# Allegro board PP001751.01.brd
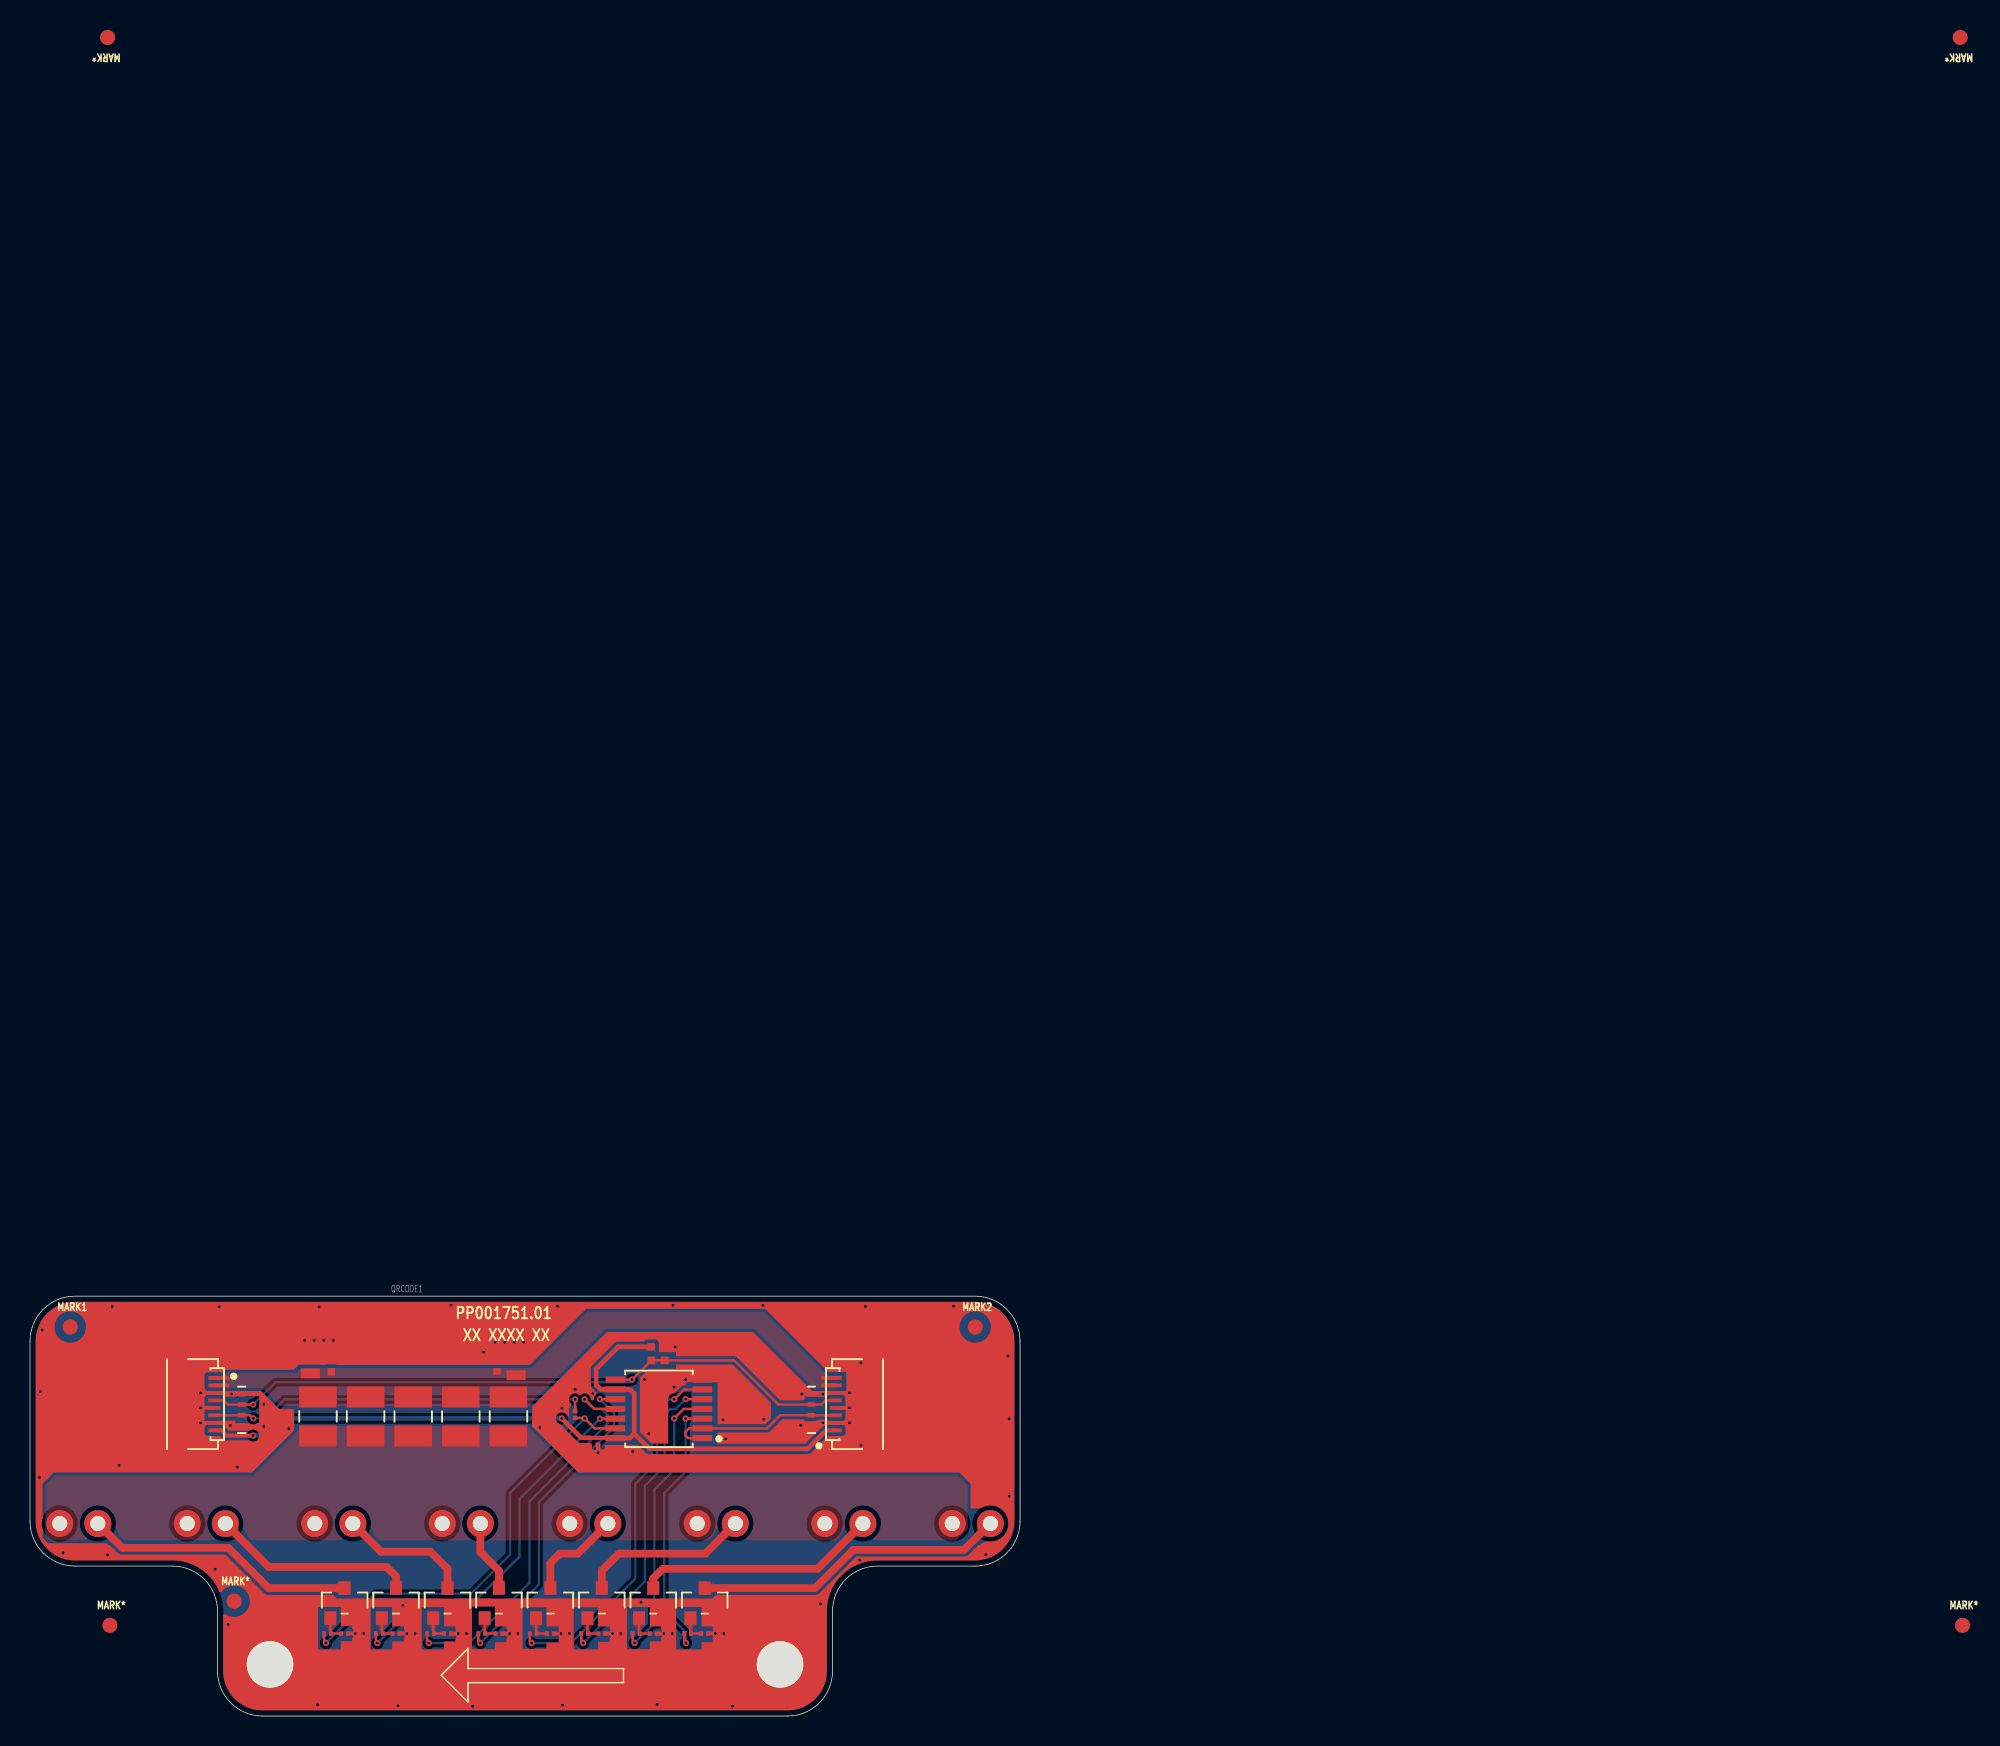
[diagram p0: board, top side]
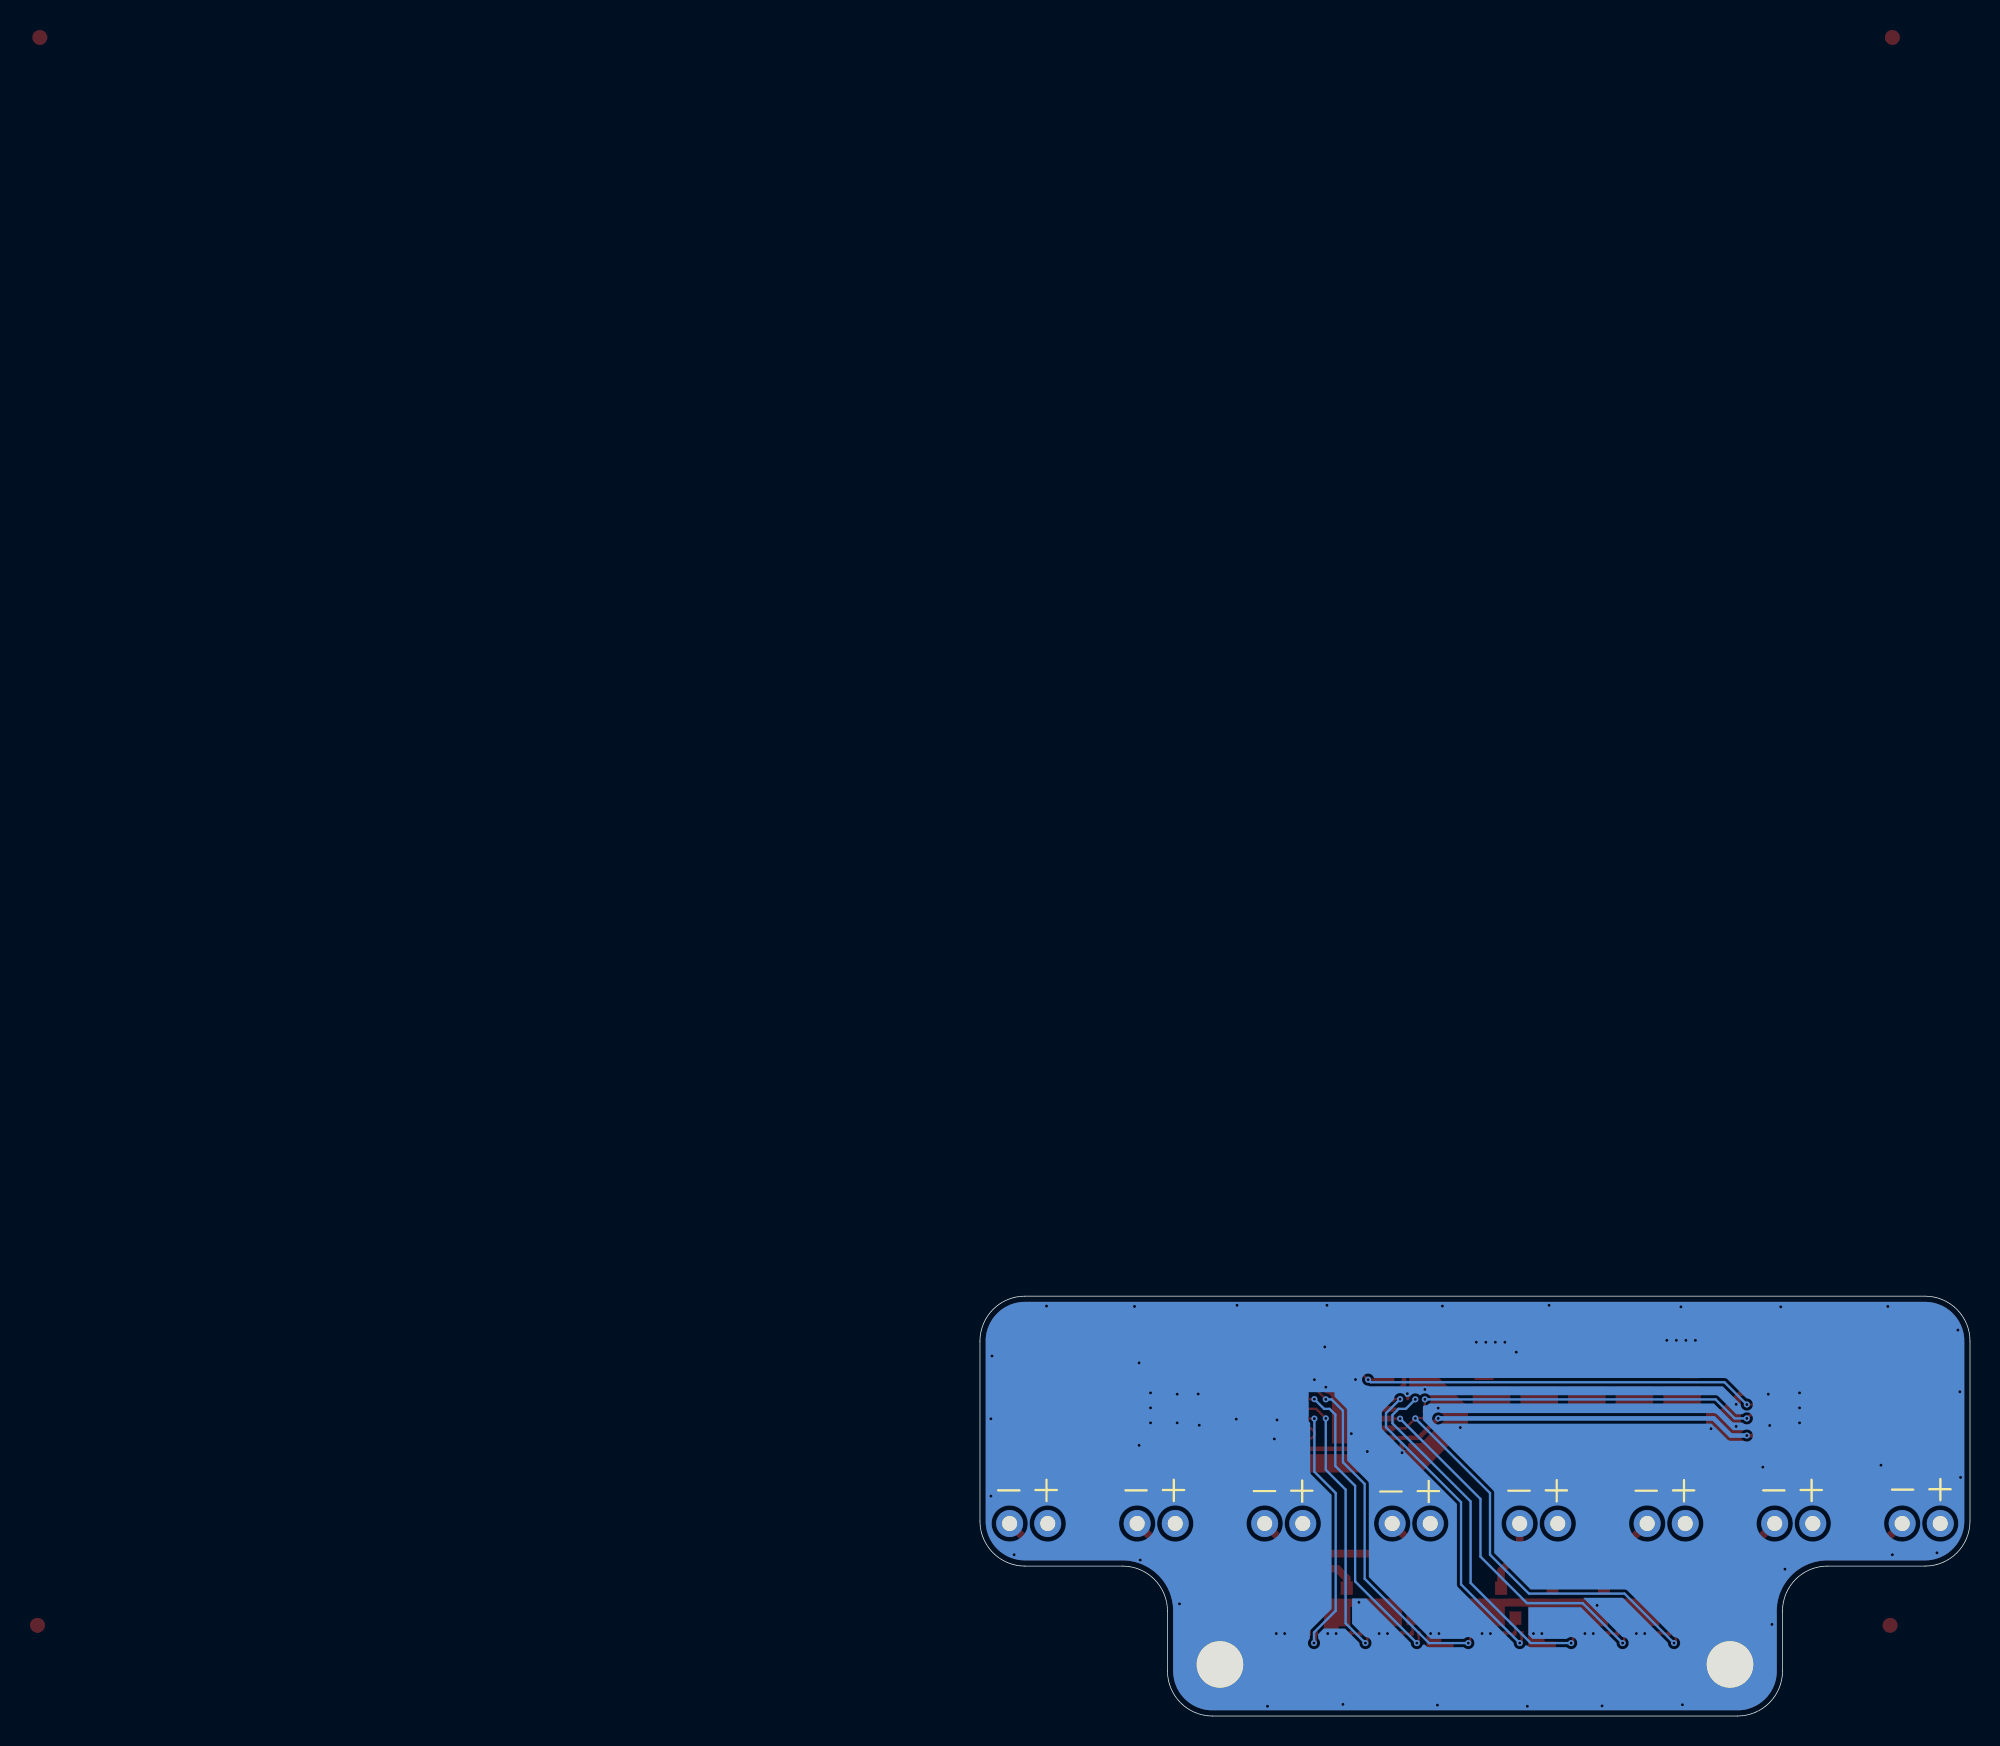
[diagram p1: board, bottom side, seen from below]

Outline 66 x 28 mm; copper layers: TOP, BOTTOM. Coordinates in mm from the lower left corner of the outline.
Outline path: 0,25 0,13 arc(0.88,10.88) 3,10 9.5,10 arc(11.62,9.12) 12.5,7 12.5,3 arc(13.38,0.88) 15.5,0 50.5,0 arc(52.62,0.88) 53.5,3 53.5,7 arc(54.38,9.12) 56.5,10 63,10 arc(65.12,10.88) 66,13 66,25 arc(65.12,27.13) 63,28 3,28 arc(0.88,27.13) 0,25

## Design rules (mm)
constraint set DEFAULT: min track width 0.152
net group PWR: nets GND VCC_3V3

## Placement (name value [footprint] x y rotation side)
C1  100.0nF  [C0201_A]  37.86 18.33 270 top
C2  10.0uF  [C0805_D]  18.69 23.53 90 top
C3  10.0uF  [C0805_D]  32.4 23.41 90 top
C4  1.0uF  [C0402_B]  31.13 23.36 90 top
C5  100nF  [C0402]  20.08 23.41 90 top
D1  SFH4550E9610_NC  [D_5P9X5P5-9]  62.75 12.84 0 bottom
D2  SFH4550E9610_NC  [D_5P9X5P5-9]  54.25 12.84 0 bottom
D3  SFH4550E9610_NC  [D_5P9X5P5-9]  45.75 12.84 0 bottom
D4  SFH4550E9610_NC  [D_5P9X5P5-9]  37.25 12.84 0 bottom
D5  SFH4550E9610_NC  [D_5P9X5P5-9]  28.75 12.84 0 bottom
D6  SFH4550E9610_NC  [D_5P9X5P5-9]  20.25 12.84 0 bottom
D7  SFH4550E9610_NC  [D_5P9X5P5-9]  11.75 12.84 0 bottom
D8  SFH4550E9610_NC  [D_5P9X5P5-9]  3.25 12.84 0 bottom
D9  PESD5V0F1BL  [SOD882_2-0P65-1P02X0P62-0P5]  52.09 21.12 90 top
D13  PESD5V0F1BL  [SOD882_2-0P65-1P02X0P62-0P5]  52.09 19.72 270 top
D14  PESD5V0F1BL  [SOD882_2-0P65-1P02X0P62-0P5]  14.12 19.72 270 top
D15  PESD5V0F1BL  [SOD882_2-0P65-1P02X0P62-0P5]  14.12 21.12 90 top
HOLE1  Hole  [HOLE_PC5P5DC3P1]  16 3.44 0 top
HOLE2  Hole  [HOLE_PC5P5DC3P1]  50 3.44 0 top
J1  OK-F501-08325  [OK-F501_8-0P5-6X3P8-1P85]  55.17 20.8 90 top
J2  OK-F501-08325  [OK-F501_8-0P5-6X3P8-1P85]  10.83 20.8 270 top
MARK1  T POINT R  [MARK_C1]  2.69 25.95 0 top
MARK2  T POINT R  [MARK_C1]  63.01 25.95 0 top
MARK*  -  [unnamed]  13.61 7.66 0 top
MARK*#2  -  [unnamed]  5.33 6.05 0 top
MARK*#3  -  [unnamed]  128.83 6.05 0 top
MARK*#4  -  [unnamed]  128.67 111.96 180 top
MARK*#5  -  [unnamed]  5.17 111.96 180 top
NOREF  -  [#2]  108.85 0 90 top
NOREF#2  -  [#2]  0 114.54 0 top
Q1  MMSS8050-H  [SOT-23_3-1P9-3P04X1P4-1P22]  44.98 7.53 0 top
Q2  MMSS8050-H  [SOT-23_3-1P9-3P04X1P4-1P22]  41.55 7.53 0 top
Q3  MMSS8050-H  [SOT-23_3-1P9-3P04X1P4-1P22]  38.12 7.53 0 top
Q4  MMSS8050-H  [SOT-23_3-1P9-3P04X1P4-1P22]  34.69 7.53 0 top
Q5  MMSS8050-H  [SOT-23_3-1P9-3P04X1P4-1P22]  31.26 7.53 0 top
Q6  MMSS8050-H  [SOT-23_3-1P9-3P04X1P4-1P22]  27.83 7.53 0 top
Q7  MMSS8050-H  [SOT-23_3-1P9-3P04X1P4-1P22]  24.4 7.53 0 top
Q8  MMSS8050-H  [SOT-23_3-1P9-3P04X1P4-1P22]  20.97 7.53 0 top
QRCODE1  T POINT R  [QRCODE_3P5X3P5]  25.29 25.44 0 top
R1  100.0R_NC  [R0402]  41.42 24.17 90 top
R2  100.0R_NC  [R0402]  42.31 24.17 270 top
R3  1.0KR  [R0201]  36.34 20.1 90 top
R4  82.0R  [R1210]  22.37 19.98 90 top
R5  82.0R  [R1210]  25.55 19.98 90 top
R6  82.0R  [R1210]  28.72 19.98 90 top
R7  82.0R  [R1210]  19.2 19.98 90 top
R8  82.0R_NC  [R1210]  31.9 19.98 90 top
R9  510.0R  [R0201]  43.83 5.5 180 top
R10  510.0R  [R0201]  40.4 5.5 180 top
R11  510.0R  [R0201]  36.98 5.5 180 top
R12  510.0R  [R0201]  33.55 5.5 180 top
R13  510.0R  [R0201]  30.12 5.5 180 top
R14  510.0R  [R0201]  26.69 5.5 180 top
R15  510.0R  [R0201]  23.28 5.5 180 top
R16  510.0R  [R0201]  19.83 5.5 180 top
R17  10.0KR  [R0201]  44.98 5.5 180 top
R18  10.0KR  [R0201]  41.55 5.5 180 top
R19  10.0KR  [R0201]  38.12 5.5 180 top
R20  10.0KR  [R0201]  34.69 5.5 180 top
R21  10.0KR  [R0201]  31.26 5.5 180 top
R22  10.0KR  [R0201]  27.83 5.5 180 top
R23  10.0KR  [R0201]  24.4 5.5 180 top
R24  10.0KR  [R0201]  20.97 5.5 180 top
U1  74HC164PW  [SOP_14-0P65-5P1X4P5-1P2]  41.93 20.49 90 top

## Library data of the parts
C1 = C
C2-C5 = CAP NP
D1-D8 = LED
D9 D13-D15 = PESD5V0F1BL
HOLE1 HOLE2 = Hole
J1 J2 = 1X8-CON-2
MARK1 MARK2 QRCODE1 = T POINT R
Q1-Q8 = NPN-1
R1-R3 R9-R24 = R
R4-R8 = RES
U1 = 74HC164PW

## Footprints (pads in the part's own frame, mm; a bottom-side part is the same pattern mirrored in y, then rotated)
C0201_A
  rect 0.254x0.305 smd: 1(-0.229,0) 2(0.229,0)
C0402
  rect 0.5x0.5 smd: 1(-0.45,0) 2(0.45,0)
C0402_B
  rect 0.432x0.508 smd: 1(-0.369,0) 2(0.369,0)
C0805_D
  rect 0.66x1.27 smd: 1(-0.673,0) 2(0.673,0)
D_5P9X5P5-9
  round 1.8 hole 1: A(-1.27,0) C(1.27,0)
HOLE_PC5P5DC3P1
  round 5.5 hole 3.1: 1(0,0)
MARK_C1
  round 1 smd: 1(0,0)
OK-F501_8-0P5-6X3P8-1P85
  rect 0.25x0.8 smd: 1(-1.75,1.45) 2(-1.25,1.45) 3(-0.75,1.45) 4(-0.25,1.45) 5(0.25,1.45) 6(0.75,1.45) 7(1.25,1.45) 8(1.75,1.45)
  rect 0.4x0.8 smd: 9(-2.75,-1.05) 10(2.75,-1.05)
QRCODE_3P5X3P5
  round 0.076 smd: 1(0,0)
R0201
  rect 0.254x0.305 smd: 1(-0.229,0) 2(0.229,0)
R0402
  rect 0.5x0.5 smd: 1(-0.45,0) 2(0.45,0)
R1210
  rect 1.4x2.5 smd: 1(-1.3,0) 2(1.3,0)
SOD882_2-0P65-1P02X0P62-0P5
  rect 0.3x0.5 smd: A(-0.345,0) C(0.345,0)
SOP_14-0P65-5P1X4P5-1P2
  rect 0.4x1.3 smd: 1(-1.95,-2.9) 2(-1.3,-2.9) 3(-0.65,-2.9) 4(0,-2.9) 5(0.65,-2.9) 6(1.3,-2.9) 7(1.95,-2.9) 8(1.95,2.9) 9(1.3,2.9) 10(0.65,2.9) 11(0,2.9) 12(-0.65,2.9) 13(-1.3,2.9) 14(-1.95,2.9)
SOT-23_3-1P9-3P04X1P4-1P22
  rect 0.8x0.9 smd: 1(-0.95,-1) 2(0.95,-1) 3(0,1)
unnamed
  round 1 smd: 1(0,0)

## Nets
GND: C1.2 C2.2 C3.2 C4.2 C5.2 D9.C D13.C D14.C D15.C HOLE1.1 HOLE2.1 J1.2 J1.4 J1.6 J1.9 J1.10 J2.3 J2.5 J2.7 J2.9 J2.10 Q1.2(EMITTER) Q2.2(EMITTER) Q3.2(EMITTER) Q4.2(EMITTER) Q5.2(EMITTER) Q6.2(EMITTER) Q7.2(EMITTER) Q8.2(EMITTER) QRCODE1.1(TP) R2.1 R17.1 R18.1 R19.1 R20.1 R21.1 R22.1 R23.1 R24.1 U1.7
VCC_3V3: C1.1 J1.1 J2.8 R1.2 U1.9 U1.14(VCC)
VCC_5V: C2.1 C3.1 C4.1 C5.1 J1.7 J1.8 J2.1 J2.2 R4.2 R5.2 R6.2 R7.2 R8.2
TX_CLK: D9.A D15.A J1.5 J2.4 R1.1 R2.2 U1.8
TX_DATA: D13.A J1.3 U1.1 U1.2
TX_NEXT: D14.A J2.6 R3.2
TX_Q0: R9.2 U1.3
TX_Q1: R10.2 U1.4
TX_Q2: R11.2 U1.5
TX_Q3: R12.2 U1.6
TX_Q4: R13.2 U1.10
TX_Q5: R14.2 U1.11
TX_Q6: R15.2 U1.12
TX_Q7: R3.1 R16.2 U1.13
N16762361: Q1.1 R9.1 R17.2
N16763130: Q2.1 R10.1 R18.2
N16763354: Q3.1 R11.1 R19.2
N16763582: Q4.1 R12.1 R20.2
N16763816: Q5.1 R13.1 R21.2
N16764058: Q6.1 R14.1 R22.2
N16764304: Q7.1 R15.1 R23.2
N16764556: Q8.1 R16.1 R24.2
N16764715: D1.A D2.A D3.A D4.A D5.A D6.A D7.A D8.A R4.1 R5.1 R6.1 R7.1 R8.1
N16764844: D8.C(CATHODE) Q8.3
N16766443: D1.C(CATHODE) Q1.3
N16766455: D2.C(CATHODE) Q2.3
N16766459: D3.C(CATHODE) Q3.3
N16766463: D4.C(CATHODE) Q4.3
N16766467: D5.C(CATHODE) Q5.3
N16766482: D6.C(CATHODE) Q6.3
N16766486: D7.C(CATHODE) Q7.3

Pads without a net: MARK1 1; MARK2 1; MARK* 1; MARK*#2 1; MARK*#3 1; MARK*#4 1; MARK*#5 1

## Via types
v1: diameter 0.406, hole 0.203, TOP to BOTTOM, 110 vias

## Routing (per net, layer and track width the routed paths; a pad name or vN(x,y) marks a point on that pad's centre or on a via; arc(x,y) is an arc through that point)
GND: length 29.8
  TOP w0.254: v1(11.36,19.55) J2.7 13.18,19.55 v1(13.35,19.38) D14.C ; D15.C v1(13.44,21.47) 13.26,21.47 13.17,21.55 J2.3 v1(11.36,21.55) ; v1(52.85,21.47) 52.94,21.55 J1.6 v1(54.63,21.55) ; R20.1 v1(35.4,5.5) ; R24.1 v1(21.68,5.5) ; R19.1 v1(38.83,5.5) ; R23.1 v1(25.11,5.5) ; J1.4 v1(54.63,20.55) ; J2.5 v1(11.36,20.55) ; R17.1 v1(45.69,5.5) ; v1(52.85,19.55) J1.2 v1(54.63,19.55) ; R21.1 v1(31.97,5.5) ; R22.1 v1(28.54,5.5) ; R18.1 v1(42.26,5.5)
  TOP w0.305: U1.7 v1(43.71,22.44) ; D9.C v1(52.85,21.47) ; Q5.2 32.53,6.21 v1(32.53,5.5) ; v1(42.82,5.5) 42.82,6.21 Q2.2 ; v1(22.24,5.5) 22.24,6.21 Q8.2 ; Q4.2 35.96,6.21 v1(35.96,5.5) ; Q3.2 39.39,6.21 v1(39.39,5.5) ; v1(25.67,5.5) 25.67,6.21 Q7.2 ; Q1.2 46.25,6.21 v1(46.25,5.5) ; v1(52.85,19.55) 52.67,19.38 D13.C ; C1.2 v1(37.86,17.56) ; J1.9 v1(55.39,18.05) ; v1(29.1,5.5) 29.1,6.21 Q6.2 ; J1.10 v1(55.39,23.55) ; R2.1 v1(43.01,24.62)
  vias: v1(0.63,15.91) v1(0.68,21.63) v1(0.81,25.74) v1(2.2,10.88) v1(5.17,10.76) v1(5.48,27.32) v1(5.94,16.73) v1(12.34,9.79) v1(12.62,27.29) v1(13.2,6.11) v1(13.81,16.6) v1(15.59,20.79) v1(15.59,19.32) v1(17.27,19.17) v1(18.31,25.06) v1(18.94,25.06) v1(19.17,0.75) v1(19.27,27.29) v1(19.58,25.06) v1(20.21,25.06) v1(24.53,0.67) v1(24.86,7.38) v1(28.06,27.39) v1(29.51,0.65) v1(30.24,24.27) v1(31.01,24.93) v1(31.64,24.93) v1(32.28,24.93) v1(32.91,24.93) v1(33.98,19.24) v1(35.17,27.34) v1(35.45,20.54) v1(35.5,0.72) v1(36.34,21.78) v1(37.51,21.5) v1(40.18,17.64) v1(40.73,7.58) v1(40.96,22.44) v1(41.24,18.83) v1(41.8,0.78) v1(42.87,27.39) v1(42.94,21.93) v1(46.2,19.75) v1(46.37,18.48) v1(46.83,0.65) v1(48.86,27.39) v1(48.91,19.8) v1(51.38,19.39) v1(51.45,21.48) v1(52.7,7.48) v1(55.31,10.4) v1(55.7,27.32) v1(61.56,27.34) v1(63.72,10.76) v1(65.19,24.02) v1(65.27,19.83) v1(65.27,14.67)
VCC_3V3: length 54.5
  TOP w0.254: 52.89,18.87 53.07,19.05 J1.1 ; J2.8 12.75,19.05 13.1,18.71 v1(14.88,18.71) ; U1.14 39.01,18.56 C1.1 37.36,18.56
  TOP w0.305: 40.28,18.83 41.29,17.82 51.83,17.82 52.89,18.87 ; 40.28,18.83 39.98,18.54 U1.14 ; 40.28,18.83 40.28,21.5 39.99,21.79 U1.9 38.04,21.79 37.74,22.09 37.74,23.15 39.2,24.62 R1.2 ; v1(35.45,19.85) 36.75,18.56 37.36,18.56
  BOTTOM w0.305: v1(35.45,19.85) 17.09,19.85 15.94,18.71 v1(14.88,18.71)
VCC_5V: length 3.5
  TOP w0.254: J1.7 52.85,22.05 ; J2.2 13.18,22.05 ; J2.1 13.18,22.55 ; J1.8 52.85,22.55
TX_CLK: length 45.2
  TOP w0.152: J2.4 12.91,21.05 13.19,20.78 D15.A v1(14.88,20.78) ; J1.5 53.04,21.05 52.76,20.78 D9.A 49.89,20.78 46.95,23.72 R2.2 R1.1 40.14,22.44 v1(40.13,22.44) U1.8
  BOTTOM w0.152: v1(14.88,20.78) 16.37,22.26 39.95,22.26 v1(40.13,22.44)
TX_DATA: length 11.9
  TOP w0.152: J1.3 52.1,20.05 D13.A 50.02,20.07 49.14,19.19 U1.2 43.93,19.19 43.7,18.95 43.7,18.72 43.88,18.54 U1.1
TX_NEXT: length 25.5
  TOP w0.152: v1(14.88,19.85) 14.66,20.07 D14.A 14.1,20.05 J2.6 ; R3.2 v1(36.34,21.12)
  BOTTOM w0.152: v1(36.34,21.12) 16.96,21.12 15.69,19.85 v1(14.88,19.85)
TX_Q0: length 18
  TOP w0.152: R9.2 43.6,4.99 v1(43.73,4.86) ; U1.3 v1(43.71,19.84)
  BOTTOM w0.152: v1(43.73,4.86) 43.73,5.58 42.28,7.02 42.28,14.87 43.71,16.3 v1(43.71,19.84)
TX_Q1: length 18.9
  TOP w0.152: v1(40.3,4.86) 40.18,4.99 R10.2 ; U1.4 43.58,20.49 v1(42.94,19.85)
  BOTTOM w0.152: v1(42.94,19.85) 42.94,16.42 41.62,15.1 41.62,6.19 v1(40.3,4.86)
TX_Q2: length 21.1
  TOP w0.152: R11.2 36.75,4.99 v1(36.87,4.86) ; U1.5 v1(43.71,21.14)
  BOTTOM w0.152: v1(43.71,21.14) 43.06,20.49 42.69,20.49 42.31,20.1 42.31,16.68 40.99,15.36 40.99,8.98 v1(36.87,4.86)
TX_Q3: length 24.8
  TOP w0.152: R12.2 33.32,4.99 v1(33.44,4.86) ; v1(42.94,21.12) 43.61,21.79 U1.6
  BOTTOM w0.152: v1(33.44,4.86) 36.06,4.86 40.35,9.16 40.35,15.48 41.8,16.93 41.8,20.36 42.56,21.12 v1(42.94,21.12)
TX_Q4: length 22.1
  TOP w0.152: R13.2 29.89,4.99 v1(30.02,4.86) ; U1.10 v1(37.99,21.14)
  BOTTOM w0.152: v1(37.99,21.14) 38.93,20.2 38.93,19.27 33.93,14.26 33.93,8.78 v1(30.02,4.86)
TX_Q5: length 26.7
  TOP w0.152: R14.2 26.46,4.99 v1(26.59,4.86) ; U1.11 37.61,20.49 v1(36.98,21.12)
  BOTTOM w0.152: v1(36.98,21.12) 37.61,20.49 38.09,20.49 38.5,20.08 38.5,19.52 33.29,14.31 33.29,8.88 29.28,4.86 v1(26.59,4.86)
TX_Q6: length 25
  TOP w0.152: v1(23.16,4.86) 23.06,4.97 R15.2 ; U1.12 v1(37.99,19.84)
  BOTTOM w0.152: v1(23.16,4.86) 25.82,7.53 29.53,7.53 32.63,10.63 32.63,14.48 v1(37.99,19.84)
TX_Q7: length 29.5
  TOP w0.152: v1(19.73,4.86) 19.6,4.99 R16.2 ; U1.13 37.64,19.19 v1(36.98,19.85) 36.95,19.88 R3.1
  BOTTOM w0.152: v1(19.73,4.86) 23.03,8.17 29.41,8.17 32,10.76 32,14.87 v1(36.98,19.85)
N16762361: length 1.7
  TOP w0.152: R17.2 R9.1 44.03,5.54 Q1.1
N16763130: length 1.7
  TOP w0.152: R18.2 R10.1 40.6,5.54 Q2.1
N16763354: length 1.7
  TOP w0.152: Q3.1 37.17,5.54 R11.1 R19.2
N16763582: length 1.7
  TOP w0.152: Q4.1 33.74,5.54 R12.1 R20.2
N16763816: length 1.7
  TOP w0.152: Q5.1 30.31,5.54 R13.1 R21.2
N16764058: length 1.7
  TOP w0.152: R22.2 R14.1 26.88,5.54 Q6.1
N16764304: length 1.7
  TOP w0.152: Q7.1 23.45,5.56 R15.1 R23.2
N16764556: length 1.7
  TOP w0.152: Q8.1 20.02,5.54 R16.1 R24.2
N16764844: length 18.2
  TOP w0.508: Q8.3 15.91,8.53 13.23,11.21 6.15,11.21 D8.C
N16766443: length 20.8
  TOP w0.508: D1.C 62.27,11.09 54.88,11.09 52.33,8.53 Q1.3
N16766455: length 16.1
  TOP w0.508: Q2.3 41.55,9.18 42.18,9.82 52.5,9.82 D2.C
N16766459: length 11.4
  TOP w0.508: Q3.3 38.12,9.69 39.26,10.83 45.01,10.83 D3.C
N16766463: length 6.6
  TOP w0.508: Q4.3 34.69,10.2 35.32,10.83 36.51,10.83 D4.C
N16766467: length 4.8
  TOP w0.508: D5.C 30.02,10.93 31.26,9.69 Q5.3
N16766482: length 8.8
  TOP w0.508: Q6.3 27.83,9.82 26.69,10.96 23.4,10.96 D6.C
N16766486: length 13.6
  TOP w0.508: Q7.3 24.4,9.31 23.77,9.94 15.92,9.94 D7.C

## Copper pours and planes (outline as drawn; the poured copper is in the pictures)
GND on TOP (solid shape): 49.4,20.88 49.4,19.84 49.02,19.47 45.87,19.47 45.84,19.48 45.84,22.26 43.73,22.26 43.73,22.07 43.61,22.07 43.5,22.04 43.41,21.98 42.96,21.53 42.94,21.53 42.65,21.41 42.54,21.12 42.54,21.11 42.54,19.87 42.54,19.84 42.54,18.17 41.44,18.17 40.66,18.96 40.66,22.56 41.25,23.15 43.07,23.15 43.07,23.44 46.83,23.44
GND on TOP (solid shape): 63,27.62 63.07,27.62 63.22,27.61 63.37,27.6 63.51,27.57 63.65,27.54 63.8,27.5 63.93,27.45 64.07,27.4 64.2,27.33 64.33,27.26 64.46,27.18 64.57,27.1 64.69,27.01 64.8,26.91 64.9,26.8 65,26.69 65.09,26.58 65.18,26.46 65.26,26.34 65.33,26.21 65.39,26.07 65.45,25.94 65.5,25.8 65.54,25.66 65.57,25.52 65.59,25.37 65.61,25.22 65.62,25.08 65.62,25 65.62,13 65.62,12.93 65.61,12.78 65.59,12.63 65.57,12.49 65.54,12.35 65.5,12.2 65.45,12.07 65.39,11.93 65.33,11.8 65.26,11.67 65.18,11.54 65.09,11.42 65,11.31 64.9,11.2 64.8,11.1 64.69,11 64.57,10.91 64.46,10.82 64.33,10.74 64.2,10.67 64.07,10.61 63.93,10.55 63.8,10.5 63.65,10.46 63.51,10.43 63.37,10.41 63.22,10.39 63.07,10.38 63,10.38 56.5,10.38 56.42,10.38 56.25,10.37 56.09,10.36 55.92,10.33 55.76,10.3 55.6,10.26 55.44,10.21 55.28,10.16 55.13,10.09 54.98,10.02 54.83,9.94 54.69,9.86 54.55,9.76 54.42,9.67 54.29,9.56 54.17,9.45 54.05,9.33 53.94,9.21 53.83,9.08 53.73,8.95 53.64,8.81 53.56,8.67 53.48,8.52 53.41,8.37 53.34,8.22 53.29,8.06 53.24,7.9 53.2,7.74 53.17,7.58 53.14,7.41 53.13,7.25 53.12,7.08 53.12,7 53.12,3 53.12,2.93 53.11,2.78 53.09,2.63 53.07,2.49 53.04,2.35 53,2.2 52.95,2.07 52.89,1.93 52.83,1.8 52.76,1.67 52.68,1.54 52.59,1.42 52.5,1.31 52.4,1.2 52.3,1.1 52.19,1 52.07,0.91 51.95,0.82 51.83,0.74 51.7,0.67 51.57,0.61 51.43,0.55 51.3,0.5 51.15,0.46 51.01,0.43 50.87,0.41 50.72,0.39 50.57,0.38 50.5,0.38 15.5,0.38 15.43,0.38 15.28,0.39 15.13,0.41 14.99,0.43 14.85,0.46 14.7,0.5 14.57,0.55 14.43,0.61 14.3,0.67 14.17,0.74 14.04,0.82 13.92,0.91 13.81,1 13.7,1.1 13.6,1.2 13.5,1.31 13.41,1.42 13.32,1.54 13.24,1.67 13.17,1.8 13.11,1.93 13.05,2.07 13,2.2 12.96,2.35 12.93,2.49 12.91,2.63 12.89,2.78 12.88,2.93 12.88,3 12.88,4.43 44.77,4.43 44.77,4.92 45.51,4.92 45.51,5.2 45.52,5.22 45.54,5.25 45.55,5.29 45.56,5.33 45.56,5.35 45.56,5.65 45.56,5.67 45.55,5.71 45.54,5.75 45.52,5.78 45.51,5.8 45.51,5.98 44.77,5.98 44.77,7.28 43.07,7.28 43.07,4.43 37.86,4.43 37.86,4.46 41.32,4.46 41.32,4.97 42.08,4.97 42.08,5.2 42.09,5.22 42.11,5.25 42.13,5.29 42.13,5.33 42.13,5.35 42.13,5.65 42.13,5.67 42.13,5.71 42.11,5.75 42.09,5.78 42.08,5.8 42.08,5.98 41.32,5.98 41.32,7.28 39.79,7.28 39.79,4.46 37.86,4.46 37.86,4.94 38.65,4.94 38.65,5.2 38.66,5.22 38.68,5.25 38.7,5.29 38.7,5.33 38.7,5.35 38.7,5.65 38.7,5.67 38.7,5.71 38.68,5.75 38.66,5.78 38.65,5.8 38.65,5.98 37.86,5.98 37.86,7.25 36.24,7.25 36.24,4.43 27.6,4.43 27.6,4.46 31.01,4.46 31.01,4.48 33.3,4.48 33.33,4.48 33.37,4.46 33.42,4.46 33.47,4.46 33.52,4.46 33.56,4.48 33.59,4.48 34.44,4.48 34.44,4.89 35.25,4.89 35.25,5.24 35.26,5.27 35.27,5.32 35.27,5.35 35.27,5.65 35.27,5.68 35.26,5.73 35.25,5.76 35.25,5.98 34.44,5.98 34.44,7.25 32.84,7.25 32.84,4.48 31.01,4.48 31.01,4.92 31.77,4.92 31.77,5.18 31.78,5.19 31.81,5.22 31.83,5.25 31.84,5.29 31.84,5.33 31.85,5.35 31.85,5.65 31.84,5.67 31.84,5.71 31.83,5.75 31.81,5.78 31.78,5.81 31.77,5.82 31.77,5.98 31.01,5.98 31.01,7.3 29.46,7.3 29.46,4.46 27.6,4.46 27.6,4.97 28.36,4.97 28.36,5.2 28.38,5.22 28.4,5.25 28.41,5.29 28.42,5.33 28.42,5.35 28.42,5.65 28.42,5.67 28.41,5.71 28.4,5.75 28.38,5.78 28.36,5.8 28.36,5.98 27.6,5.98 27.6,7.25 26.1,7.25 26.1,4.43 24.15,4.43 24.15,4.97 24.94,4.97 24.94,5.2 24.95,5.22 24.97,5.25 24.98,5.29 24.99,5.33 24.99,5.35 24.99,5.65 24.99,5.67 24.98,5.71 24.97,5.75 24.95,5.78 24.94,5.8 24.94,5.98 24.15,5.98 24.15,7.28 22.7,7.28 22.7,4.43 20.72,4.43 20.72,4.99 21.48,4.99 21.48,5.18 21.5,5.19 21.52,5.22 21.54,5.25 21.55,5.29 21.56,5.33 21.56,5.35 21.56,5.65 21.56,5.67 21.55,5.71 21.54,5.75 21.52,5.78 21.5,5.81 21.48,5.82 21.48,6.01 20.72,6.01 20.72,7.28 19.2,7.28 19.2,4.43 12.88,4.43 12.88,6.69 12.89,6.73 12.9,6.75 12.92,6.77 12.95,6.79 12.97,6.79 13,6.79 13.07,6.75 13.15,6.71 13.23,6.68 13.31,6.65 13.39,6.63 13.48,6.62 13.56,6.61 13.65,6.61 13.74,6.62 13.84,6.63 13.92,6.66 14.01,6.69 14.09,6.73 14.17,6.77 14.25,6.83 14.32,6.88 14.38,6.95 14.44,7.02 14.49,7.09 14.54,7.17 14.58,7.26 14.61,7.34 14.63,7.43 14.65,7.52 14.66,7.61 14.66,7.7 14.65,7.8 14.63,7.89 14.61,7.97 14.58,8.06 14.54,8.14 14.49,8.22 14.44,8.3 14.38,8.37 14.32,8.43 14.25,8.49 14.17,8.55 14.09,8.59 14.01,8.63 13.92,8.66 13.84,8.68 13.74,8.7 13.65,8.71 13.56,8.71 13.47,8.7 13.37,8.68 13.28,8.66 13.19,8.62 13.11,8.58 13.02,8.53 12.95,8.48 12.88,8.41 12.81,8.35 12.77,8.3 12.75,8.28 12.72,8.27 12.69,8.27 12.66,8.28 12.63,8.29 12.61,8.32 12.58,8.41 12.5,8.55 12.42,8.7 12.34,8.84 12.25,8.97 12.15,9.1 12.04,9.23 11.93,9.35 11.81,9.47 11.69,9.58 11.56,9.68 11.43,9.78 11.29,9.87 11.15,9.95 11.01,10.03 10.86,10.1 10.71,10.16 10.55,10.21 10.39,10.26 10.23,10.3 10.07,10.33 9.91,10.36 9.75,10.37 9.58,10.38 9.5,10.38 3,10.38 2.93,10.38 2.78,10.39 2.63,10.41 2.49,10.43 2.35,10.46 2.2,10.5 2.07,10.55 1.93,10.61 1.8,10.67 1.67,10.74 1.54,10.82 1.42,10.91 1.31,11 1.2,11.1 1.1,11.2 1,11.31 0.91,11.42 0.82,11.54 0.74,11.67 0.67,11.8 0.61,11.93 0.55,12.07 0.5,12.2 0.46,12.35 0.43,12.49 0.41,12.63 0.39,12.78 0.39,12.84 0.78,12.84 0.78,12.8 0.78,12.71 0.8,12.62 0.82,12.53 0.83,12.48 0.83,11.89 1.2,11.52 5.06,11.52 5.11,11.49 5.18,11.44 5.22,11.41 5.24,11.4 5.3,11.38 5.34,11.38 5.82,10.89 5.84,10.87 5.89,10.83 5.94,10.8 6,10.78 6.06,10.77 6.12,10.76 6.15,10.76 13.04,10.76 15.59,8.21 15.61,8.19 15.66,8.15 15.71,8.12 15.76,8.1 15.82,8.08 15.88,8.07 15.91,8.07 20.17,8.07 20.21,8.06 20.29,8.01 20.32,7.98 20.33,7.96 20.35,7.92 20.38,7.89 20.41,7.86 20.45,7.84 20.47,7.83 21.37,7.83 21.44,7.84 23.93,7.84 24,7.83 24.8,7.83 24.87,7.84 27.36,7.84 27.43,7.83 28.23,7.83 28.3,7.84 30.79,7.84 30.86,7.83 31.66,7.83 31.73,7.84 34.22,7.84 34.29,7.83 35.09,7.83 35.16,7.84 37.65,7.84 37.72,7.83 38.52,7.83 38.59,7.84 41.08,7.84 41.15,7.83 41.95,7.83 42.02,7.84 44.51,7.84 44.58,7.83 45.38,7.83 45.4,7.83 45.44,7.84 45.49,7.85 45.52,7.87 45.56,7.9 45.59,7.94 45.64,7.99 45.69,8.03 45.75,8.06 45.78,8.07 52.33,8.07 52.36,8.07 52.42,8.08 52.47,8.1 52.53,8.12 52.58,8.15 52.63,8.19 52.65,8.21 55.07,10.63 62.27,10.63 62.3,10.63 62.36,10.64 62.42,10.65 62.47,10.68 62.52,10.71 62.57,10.74 62.59,10.76 63.2,11.38 63.25,11.38 63.3,11.4 63.32,11.41 63.36,11.44 63.44,11.49 63.51,11.54 63.6,11.58 63.68,11.61 63.77,11.64 63.82,11.65 63.87,11.64 63.97,11.64 64.07,11.63 64.17,11.64 64.26,11.66 64.36,11.68 64.45,11.71 64.54,11.75 64.62,11.8 64.71,11.85 64.78,11.91 64.86,11.97 64.92,12.04 64.99,12.12 65.04,12.2 65.09,12.28 65.13,12.37 65.17,12.46 65.19,12.55 65.21,12.65 65.22,12.74 65.23,12.84 65.22,12.94 65.21,13.03 65.19,13.13 65.17,13.22 65.13,13.31 65.09,13.4 65.04,13.48 64.99,13.56 64.92,13.64 64.86,13.71 64.78,13.77 64.71,13.83 64.62,13.88 64.54,13.93 64.45,13.97 64.36,14 64.26,14.02 64.17,14.04 64.07,14.04 63.97,14.04 63.88,14.04 63.78,14.02 63.68,14 63.59,13.97 63.5,13.93 63.42,13.88 63.37,13.86 62.71,13.86 62.71,15.49 61.95,16.24 36.55,16.24 33.47,19.33 33.47,19.85 35.04,19.85 35.05,19.82 35.05,19.77 35.07,19.71 35.09,19.66 35.12,19.61 35.16,19.57 35.2,19.53 35.25,19.5 35.3,19.47 35.34,19.46 36.5,18.3 36.52,18.28 36.56,18.25 36.61,18.23 36.66,18.21 36.72,18.2 36.75,18.2 37.36,18.2 37.4,18.19 37.42,18.18 37.44,18.16 37.45,18.14 37.46,18.1 37.46,17.79 37.57,17.79 37.58,17.78 37.62,17.76 37.65,17.75 37.69,17.74 37.71,17.74 38.02,17.74 38.04,17.74 38.08,17.75 38.11,17.76 38.15,17.78 38.16,17.79 38.32,17.79 38.32,18.07 40.54,18.07 41.04,17.57 41.06,17.55 41.11,17.51 41.16,17.49 41.21,17.47 41.27,17.46 41.29,17.46 51.83,17.46 51.86,17.46 51.92,17.47 51.97,17.49 52.02,17.51 52.07,17.55 52.09,17.57 53.14,18.62 53.19,18.68 53.32,18.68 54.12,18.68 54.14,18.68 54.18,18.68 54.22,18.7 54.26,18.72 54.3,18.75 54.33,18.78 54.35,18.82 54.36,18.86 54.37,18.91 54.37,18.93 54.37,19.18 54.37,19.2 54.36,19.25 54.35,19.29 54.33,19.33 54.3,19.36 54.26,19.39 54.22,19.41 54.18,19.43 54.14,19.43 54.12,19.43 53.32,19.43 53.29,19.43 53.24,19.42 53.2,19.41 53.17,19.39 53.04,19.38 52.99,19.38 52.94,19.36 52.9,19.34 52.86,19.31 52.75,19.2 52.71,19.18 52.66,19.15 52.64,19.13 51.69,18.17 45.84,18.17 45.84,18.89 45.87,18.91 49.14,18.91 49.16,18.91 49.2,18.91 49.24,18.93 49.28,18.95 49.32,18.97 49.34,18.99 50.14,19.79 51.53,19.79 51.58,19.76 51.6,19.74 51.63,19.71 51.66,19.68 51.68,19.66 52.34,19.66 52.36,19.66 52.4,19.67 52.45,19.69 52.49,19.71 52.5,19.72 52.53,19.73 52.59,19.74 52.64,19.76 52.67,19.78 53.07,19.78 53.21,19.7 53.25,19.68 53.3,19.68 53.32,19.68 54.12,19.68 54.14,19.68 54.19,19.69 54.23,19.7 54.27,19.73 54.31,19.76 54.34,19.8 54.36,19.84 54.37,19.9 54.37,20.94 54.37,20.94 54.37,21.18 54.37,21.2 54.36,21.25 54.35,21.29 54.33,21.33 54.3,21.36 54.26,21.39 54.22,21.41 54.18,21.43 54.14,21.43 54.12,21.43 53.32,21.43 53.3,21.43 53.25,21.43 53.21,21.41 53.07,21.33 52.96,21.32 51.63,21.32 51.63,21.1 51.53,21.06 50.01,21.06 47.15,23.92 47.13,23.93 47.1,23.96 47.06,23.98 47.02,23.99 46.97,24 46.95,24 43.07,24 43.07,24.27 41.92,24.27 41.92,24.87 41.92,24.89 41.92,24.94 41.9,24.98 41.88,25.02 41.85,25.05 41.82,25.08 41.78,25.1 41.74,25.12 41.69,25.12 41.67,25.12 41.17,25.12 41.15,25.12 41.1,25.11 41.06,25.1 41.02,25.08 40.99,25.05 40.96,25.01 40.92,24.99 40.9,24.98 39.2,24.98 39.18,24.97 39.12,24.97 39.07,24.95 39.02,24.92 38.97,24.89 38.95,24.87 37.49,23.4 37.47,23.38 37.43,23.34 37.41,23.29 37.39,23.24 37.38,23.18 37.38,23.15 37.38,22.09 37.38,22.06 37.39,22.01 37.41,21.95 37.43,21.9 37.47,21.86 37.49,21.84 37.73,21.59 37.75,21.56 37.76,21.53 37.76,21.5 37.75,21.48 37.71,21.43 37.67,21.38 37.64,21.34 37.61,21.29 37.6,21.23 37.59,21.18 37.58,21.13 37.57,21.11 37.56,21.08 37.53,21.06 37.51,21.05 37.48,21.05 37.45,21.06 37.42,21.07 37.38,21.11 37.38,21.16 37.37,21.21 37.35,21.27 37.33,21.32 37.3,21.37 37.26,21.41 37.22,21.45 37.17,21.48 37.12,21.5 37.06,21.52 37,21.53 36.94,21.53 36.88,21.52 36.82,21.5 36.77,21.47 36.72,21.43 36.67,21.4 36.65,21.4 36.6,21.44 36.55,21.47 36.49,21.5 36.43,21.52 36.37,21.53 36.31,21.53 36.25,21.52 36.2,21.5 36.15,21.48 36.1,21.45 36.05,21.41 36.01,21.37 35.98,21.32 35.96,21.26 35.94,21.21 35.93,21.15 35.93,21.09 35.94,21.03 35.96,20.97 35.99,20.91 36.03,20.86 36.06,20.82 36.06,20.77 36.04,20.73 36.02,20.68 36.01,20.65 36,20.63 35.97,20.6 35.95,20.56 35.94,20.52 35.93,20.48 35.93,20.46 35.93,20.21 35.93,20.18 35.94,20.13 35.95,20.1 35.94,20.08 35.93,20.03 35.93,19.97 35.91,19.96 35.89,19.95 35.87,19.95 35.85,19.96 35.83,20.01 35.8,20.06 35.77,20.11 35.73,20.15 35.69,20.18 35.64,20.21 35.59,20.23 35.53,20.25 35.48,20.26 35.42,20.26 35.36,20.25 35.31,20.23 35.26,20.21 35.21,20.18 35.16,20.14 35.13,20.1 35.09,20.05 35.07,19.99 35.05,19.94 35.05,19.88 35.04,19.85 33.47,19.85 33.47,20.63 38.46,25.62 48.19,25.62 52.13,21.68 53.06,21.68 53.27,21.68 54.16,21.68 54.43,21.68 54.43,22.95 53.21,22.95 50.17,25.99 61.96,25.99 61.96,25.9 61.97,25.81 61.98,25.72 62.01,25.63 62.04,25.54 62.08,25.46 62.12,25.38 62.18,25.31 62.24,25.24 62.3,25.17 62.37,25.11 62.45,25.06 62.53,25.01 62.61,24.98 62.69,24.94 62.78,24.92 62.87,24.9 62.96,24.9 63.06,24.9 63.15,24.9 63.24,24.92 63.33,24.94 63.41,24.98 63.5,25.01 63.58,25.06 63.65,25.11 63.72,25.17 63.79,25.24 63.84,25.31 63.9,25.38 63.94,25.46 63.98,25.54 64.01,25.63 64.04,25.72 64.05,25.81 64.06,25.9 64.06,25.99 64.05,26.08 64.04,26.17 64.01,26.26 63.98,26.35 63.94,26.43 63.9,26.51 63.84,26.59 63.79,26.66 63.72,26.72 63.65,26.78 63.58,26.83 63.5,26.88 63.41,26.92 63.33,26.95 63.24,26.97 63.15,26.99 63.06,27 62.96,27 62.87,26.99 62.78,26.97 62.69,26.95 62.61,26.92 62.53,26.88 62.45,26.83 62.37,26.78 62.3,26.72 62.24,26.66 62.18,26.59 62.12,26.51 62.08,26.43 62.04,26.35 62.01,26.26 61.98,26.17 61.97,26.08 61.96,25.99 50.17,25.99 49,27.17 37.08,27.17 33.34,23.42 31.69,23.42 31.69,23.43 31.68,23.42 20.47,23.42 20.44,23.44 20.4,23.45 20.36,23.46 20.33,23.46 19.83,23.46 19.81,23.46 19.77,23.45 19.73,23.44 19.69,23.42 19.43,23.42 19.4,23.43 19.35,23.44 19.32,23.44 18.05,23.44 18.03,23.44 17.98,23.43 17.94,23.42 17.9,23.42 17.59,23.1 13.02,23.1 12.81,22.9 12.76,22.92 12.71,22.93 12.68,22.93 11.88,22.93 11.86,22.93 11.82,22.93 11.78,22.91 11.74,22.89 11.7,22.86 11.67,22.83 11.65,22.79 11.64,22.75 11.63,22.7 11.63,22.68 11.63,21.93 11.63,21.91 11.64,21.86 11.65,21.82 11.67,21.78 11.7,21.75 11.74,21.72 11.78,21.7 11.82,21.68 11.86,21.68 11.88,21.68 12.68,21.68 12.71,21.68 12.76,21.69 12.8,21.7 12.83,21.72 12.97,21.72 13.02,21.68 15.4,21.68 16.61,20.47 17.6,20.47 17.6,19.05 14.79,16.24 1.59,16.24 0.83,15.49 0.83,13.2 0.82,13.16 0.8,13.07 0.78,12.98 0.78,12.89 0.78,12.84 0.39,12.84 0.38,12.93 0.38,13 0.38,19.18 11.63,19.18 11.63,18.93 11.63,18.91 11.64,18.86 11.65,18.82 11.67,18.78 11.7,18.75 11.74,18.72 11.78,18.7 11.82,18.68 11.86,18.68 11.88,18.68 12.66,18.68 12.87,18.47 12.88,18.46 12.93,18.43 12.97,18.4 13.02,18.39 13.07,18.38 13.1,18.38 14.64,18.38 14.67,18.36 14.72,18.33 14.78,18.31 14.85,18.3 14.91,18.3 14.96,18.31 15.02,18.33 15.07,18.35 15.12,18.38 15.17,18.42 15.2,18.46 15.24,18.51 15.26,18.57 15.28,18.62 15.28,18.68 15.28,18.74 15.28,18.79 15.26,18.85 15.24,18.9 15.2,18.95 15.17,19 15.12,19.03 15.07,19.07 15.02,19.09 14.96,19.11 14.91,19.11 14.85,19.11 14.78,19.1 14.72,19.08 14.67,19.06 14.64,19.04 13.24,19.04 12.99,19.29 12.97,19.31 12.92,19.34 12.88,19.36 12.85,19.37 12.83,19.39 12.79,19.41 12.75,19.43 12.71,19.43 12.68,19.43 11.88,19.43 11.86,19.43 11.82,19.43 11.78,19.41 11.74,19.39 11.7,19.36 11.67,19.33 11.65,19.29 11.64,19.25 11.63,19.2 11.63,19.18 0.38,19.18 0.38,21.25 11.63,21.25 11.63,19.67 12.46,19.67 12.46,19.68 12.68,19.68 12.71,19.68 12.76,19.69 12.79,19.7 13.65,19.7 13.68,19.67 13.68,19.52 14.64,19.52 14.67,19.5 14.72,19.47 14.78,19.45 14.85,19.44 14.91,19.44 14.97,19.45 15.03,19.47 15.09,19.5 15.12,19.52 15.28,19.52 15.28,19.83 15.28,19.87 15.28,20.76 15.28,20.79 15.28,21.35 13.68,21.35 13.68,21.3 13.05,21.3 13.01,21.32 12.96,21.33 12.93,21.33 12.79,21.41 12.75,21.43 12.7,21.43 12.68,21.43 11.88,21.43 11.86,21.43 11.82,21.43 11.78,21.41 11.74,21.39 11.71,21.37 11.68,21.33 11.66,21.3 11.64,21.25 0.38,21.25 0.38,25 0.38,25.08 0.39,25.22 0.41,25.37 0.43,25.52 0.46,25.66 0.5,25.8 0.55,25.94 0.58,25.99 1.64,25.99 1.64,25.9 1.64,25.81 1.66,25.72 1.68,25.63 1.71,25.54 1.75,25.46 1.8,25.38 1.85,25.31 1.91,25.24 1.98,25.17 2.05,25.11 2.12,25.06 2.2,25.01 2.28,24.98 2.37,24.94 2.46,24.92 2.55,24.9 2.64,24.9 2.73,24.9 2.82,24.9 2.91,24.92 3,24.94 3.09,24.98 3.17,25.01 3.25,25.06 3.33,25.11 3.4,25.17 3.46,25.24 3.52,25.31 3.57,25.38 3.62,25.46 3.66,25.54 3.69,25.63 3.71,25.72 3.73,25.81 3.74,25.9 3.74,25.99 3.73,26.08 3.71,26.17 3.69,26.26 3.66,26.35 3.62,26.43 3.57,26.51 3.52,26.59 3.46,26.66 3.4,26.72 3.33,26.78 3.25,26.83 3.17,26.88 3.09,26.92 3,26.95 2.91,26.97 2.82,26.99 2.73,27 2.64,27 2.55,26.99 2.46,26.97 2.37,26.95 2.28,26.92 2.2,26.88 2.12,26.83 2.05,26.78 1.98,26.72 1.91,26.66 1.85,26.59 1.8,26.51 1.75,26.43 1.71,26.35 1.68,26.26 1.66,26.17 1.64,26.08 1.64,25.99 0.58,25.99 0.61,26.07 0.67,26.21 0.74,26.34 0.82,26.46 0.91,26.58 1,26.69 1.1,26.8 1.2,26.91 1.31,27.01 1.42,27.1 1.54,27.18 1.67,27.26 1.8,27.33 1.93,27.4 2.07,27.45 2.2,27.5 2.35,27.54 2.49,27.57 2.63,27.6 2.78,27.61 2.93,27.62 3,27.62
GND on BOTTOM (solid shape): outline of 2198 points within 0.38,0.38 65.62,27.62
VCC_5V on TOP: 37.17,26.96 48.91,26.96 53.1,22.77 53.1,22.01 52.98,21.88 52.22,21.88 48.28,25.82 38.37,25.82 33.23,20.68 16.69,20.68 15.49,21.88 13.1,21.88 12.97,22.01 12.97,22.77 13.1,22.9 17.77,22.9 18.09,23.22 33.42,23.22
N16764715 on TOP: 33.17,19.34 18.18,19.34 14.88,16.04 1.67,16.04 1.03,15.41 1.03,11.98 1.29,11.72 61.74,11.72 62.5,12.48 62.5,15.41 61.87,16.04 36.47,16.04

Small or netless copper shapes (teardrops, artwork), in the pictures only: 113 on TOP, 22 on BOTTOM

## Text on the board
Ref Des/Silkscreen Top: PP001751.01 | XX XXXX XX
COMPVAL_TYPE_TOP: confidential | 0 | +0.10 | 6 | 10 | 9 | 11 | 12 | 1 | 2 | 3 | 4 | 13 | 14 | 5 | 23 | 19 | 20 | 21 | ` | 7 | 8 | 15 | 16 | 17 | 18 | 22 | （R3.00） | 0.10 | 17.36 | 8.50 | * | 9.40 | 12.75 | 6.40 | 59.50 | 7*8.5= | 1.00 | 0.16 | 1.60 | 3.44 | 6.56 | 66.00 | 0.15 | 2- | 5.50 | n | 附铜 | 0.75 | 3.10 | 金属化孔 | 28.00 | 3.40 | 37.40 | 16.00 | 3.50 | 0.075 | 34.00 | 37.50
User.6: confidential | 0 | +0.10 | 6 | 10 | 9 | 11 | 1 | 2 | 3 | 4 | 13 | 14 | 5 | 23 | 21 | 19 | 20 | ` | 7 | 8 | 12 | 15 | 16 | 17 | 18 | 22 | （R3.00） | 0.10 | 14.51 | 8.50 | 12.75 | 59.50 | 7*12.75= | 6.80 | 1.00 | 0.12 | 1.20 | 3.44 | 6.56 | 66.00 | 28.00 | 0.15 | 2- | 5.50 | n | 附铜 | 0.075 | 3.10 | 金属化孔 | 3.40 | 37.40 | * | 9.40 | 16.00 | 3.50 | 34.00 | 37.50
User.8: FIGURE | FINISHED_SIZE | 8.0 | 39.37 | 122.05 | DRILL CHART: TOP to BOTTOM | ALL UNITS ARE IN MILS | TOLERANCE_DRILL | +0.0/-0.0 | +3.0/-3.0 | PLATED | QTY | 110 | 16 | 2
